# EAGLE board TMC2209_Circuit_v30 (EAGLE 9.7.0)
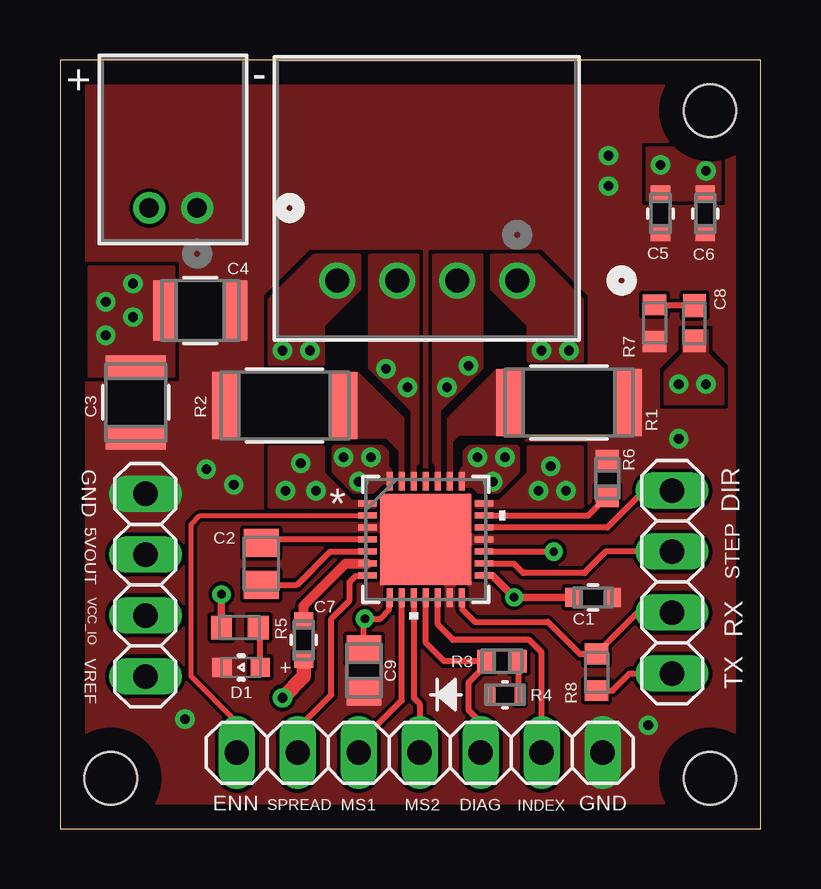
[diagram p0: board, top side]
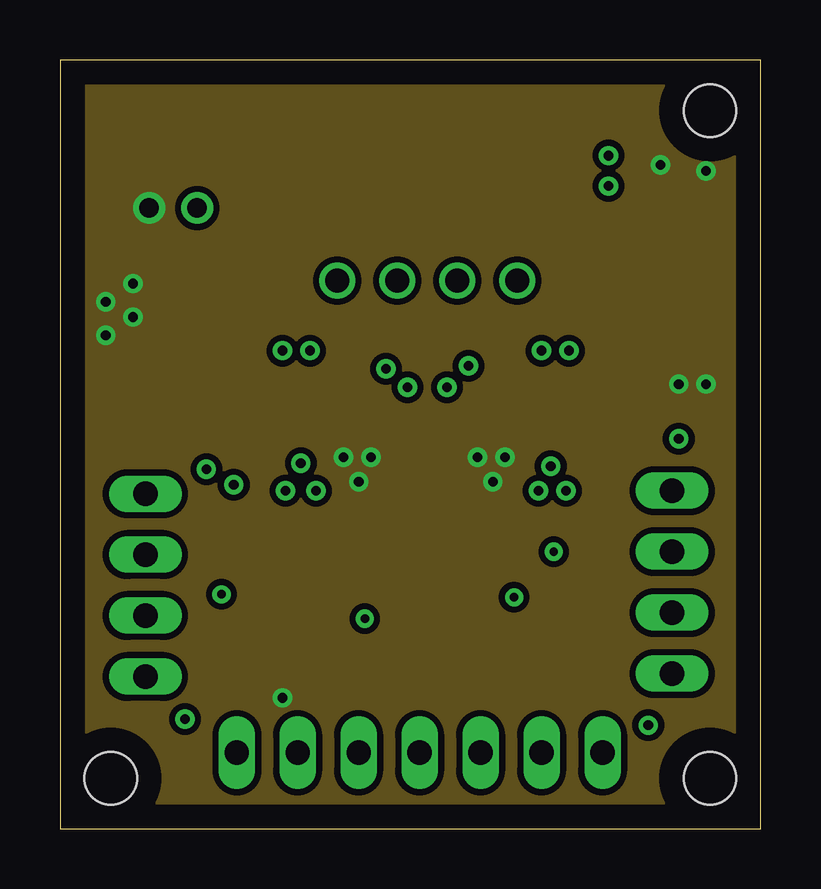
[diagram p1: board, inner layer Route2]
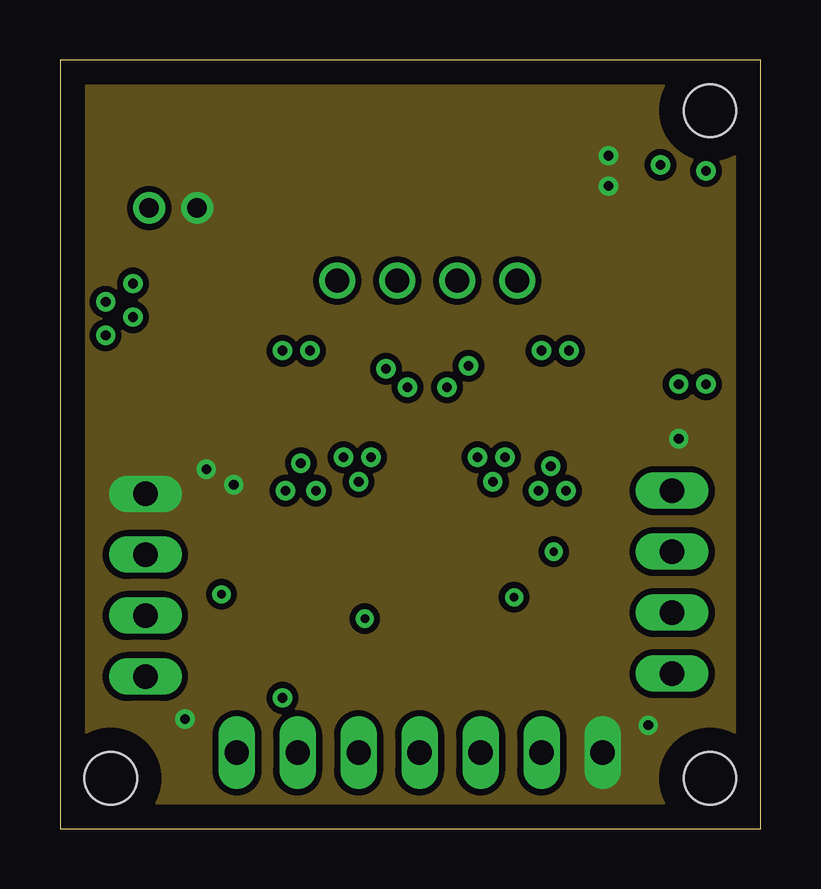
[diagram p2: board, inner layer Route15]
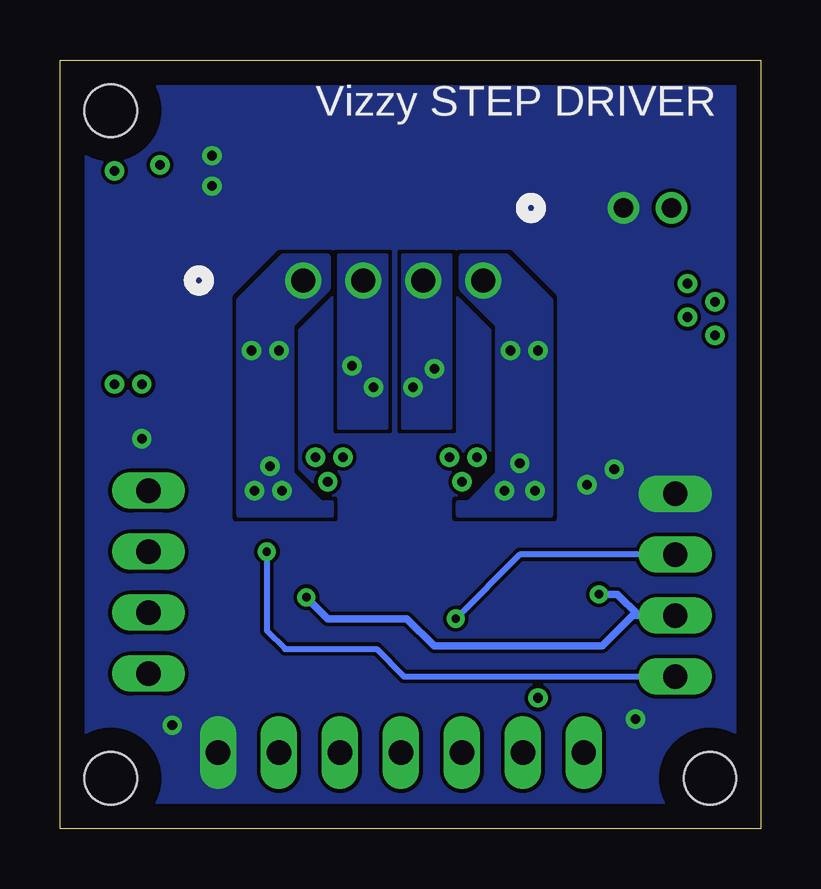
[diagram p3: board, bottom side, seen from below]

Size 29.19 x 32.05 mm. Coordinates in mm from the lower left corner, seen from the top.
Outline: 0,0 29.19,0 29.19,32.05 0,32.05 0,0
Copper layers (1+2*15+16): Top 0.035mm / dielectric 1.5mm / Route2 0.035mm / dielectric 0.15mm / Route15 0.035mm / dielectric 0.2mm / Bottom 0.035mm
Design rules "oshpark-4layer.dru": minimum track width 6mil, minimum drill 0.35mm, track to track 6mil, track to pad 6mil, pad to pad 6mil, via to via 6mil, smd to smd 6mil, copper to edge 40mil, drill to drill 6mil, minimum pad ring 10mil, minimum via ring 8mil, stop-mask expansion 4mil, vias tented up to drill 0mil, thermal gap 10mil
Holes 2.18 mm at 27.08,29.95 27.08,2.11 2.11,2.11

## Footprints (pad centres in the part's own frame; a part is rotated, then mirrored left to right if it is on the bottom)
CAP_CL10_SAM = smd 0.656 x 0.8: 1 -0.828,0; 2 0.828,0
CAPC2012X120N = smd 1.16 x 1.47: 1 -0.875,0; 2 0.875,0
CAP_CL32_SAM = smd 0.956 x 2.5: 1 -1.478,0; 2 1.478,0
CAPC1608X90N = smd 0.95 x 0.93: 1 -0.738,0; 2 0.738,0
CAP_CC0805_YAG = smd 1.118 x 1.448: 1 -0.897,0; 2 0.897,0
WL-SMCW_0603 = smd 0.8 x 0.8: 1 -0.8,0; 2 0.8,0
CONN_S4B-XH-A(LF)(SN)_JST = drill 0.991 pad 1.499: 1 0,0; 2 2.5,0; 3 5,0; 4 7.5,0
CONN_S2B-PH-K-S_JST = drill 0.813 pad 1.321: 1 0,0; 2 2,0
RES_WSLT2010_VIS = smd 1.118 x 2.794: 1 -2.464,0; 2 2.464,0
RES_CRCW_0603 = smd 0.711 x 0.94: 1 -0.673,0; 2 0.673,0
LED_SMLD12_ROM = smd 0.394 x 0.813: 1 -0.603,0; 2 0.603,0
RESC1508X50N = smd 0.86 x 0.98: 1 -0.765,0; 2 0.765,0
RES_CRCW_0603_VIS = smd 0.864 x 0.94: 1 -0.749,0; 2 0.749,0
QFN28_5X5_3X8_EPAD_TRI = smd 0.762 x 0.254: 1 -2.426,1.5; 2 -2.426,1; 3 -2.426,0.5; 4 -2.426,0; 5 -2.426,-0.5; 6 -2.426,-1; 7 -2.426,-1.5; 15 2.426,-1.5; 16 2.426,-1; 17 2.426,-0.5; 18 2.426,0; 19 2.426,0.5; 20 2.426,1; 21 2.426,1.5 | smd 0.254 x 0.762: 8 -1.5,-2.426; 9 -1,-2.426; 10 -0.5,-2.426; 11 0,-2.426; 12 0.5,-2.426; 13 1,-2.426; 14 1.5,-2.426; 22 1.5,2.426; 23 1,2.426; 24 0.5,2.426; 25 0,2.426; 26 -0.5,2.426; 27 -1,2.426; 28 -1.5,2.426 | smd 3.785 x 3.785: 29 0,0
1X04 = drill 1.016 long: 1 -3.81,0; 2 -1.27,0; 3 1.27,0; 4 3.81,0
1X07 = drill 1.016 long: 1 -7.62,0; 2 -5.08,0; 3 -2.54,0; 4 0,0; 5 2.54,0; 6 5.08,0; 7 7.62,0

## Placement (x,y rotation side)
C1  CL10B104KB8NNNCCAP_CL10_SAM  [CAP_CL10_SAM]  22.21,9.65 0 top
C2  C0805C223F5GEC7210  [CAPC2012X120N]  8.38,11.05 90 top
C3  CL32B106KBJNNNECAP_CL32_SAM  [CAP_CL32_SAM]  3.15,17.78 90 top
C4  CL32B106KBJNNNECAP_CL32_SAM  [CAP_CL32_SAM]  5.84,21.61 180 top
C5  CL10B104KB8NNNCCAP_CL10_SAM  [CAP_CL10_SAM]  25.02,25.65 90 top
C6  CL10B104KB8NNNCCAP_CL10_SAM  [CAP_CL10_SAM]  26.89,25.65 90 top
C7  CL10B104KB8NNNCCAP_CL10_SAM  [CAP_CL10_SAM]  10.16,7.87 270 top
C8  UMK107BJ105KA-T  [CAPC1608X90N]  26.44,21.08 270 top
C9  CC0805KKX7R9BB225CAP_CC0805_YAG  [CAP_CC0805_YAG]  12.66,6.6 270 top
D1  WL-SMCW_0603  [WL-SMCW_0603]  7.55,6.73 0 top
J1  S4B-XH-A(LF)(SN)CONN_S4B-XH-A(LF)(SN)_JST  [CONN_S4B-XH-A(LF)(SN)_JST]  19.05,22.86 180 top
J2  S2B-PH-K-S(LF)(SN)CONN_S2B-PH-K-S_JST  [CONN_S2B-PH-K-S_JST]  5.71,25.88 180 top
R1  WSLT2010R1200FEB18RES_WSLT2010_VIS  [RES_WSLT2010_VIS]  21.21,17.78 180 top
R2  WSLT2010R1200FEB18RES_WSLT2010_VIS  [RES_WSLT2010_VIS]  9.36,17.65 0 top
R3  CRCW0603220RFKEARES_CRCW_0603  [RES_CRCW_0603]  18.42,6.99 0 top
R4  SMLEN3WBC8W1LED_SMLD12_ROM  [LED_SMLD12_ROM]  18.54,5.59 0 top
R5  CRCW06031K00FKEA  [RESC1508X50N]  7.49,8.38 0 top
R6  CRCW0603100KFKEARES_CRCW_0603_VIS  [RES_CRCW_0603_VIS]  22.8,14.61 270 top
R7  CRCW06031R10FKEA  [RESC1508X50N]  24.77,21.08 90 top
R8  CRCW06031K00FKEA  [RESC1508X50N]  22.35,6.53 90 top
U1  TMC2209-LA-TQFN28_5X5_3X8_EPAD_TRI  [QFN28_5X5_3X8_EPAD_TRI]  15.24,12.07 0 top
U$1  PINHD-1X04_1X04M  [1X04]  3.56,10.16 90 top
U$2  PINHD-1X07_1X07M  [1X07]  14.99,3.17 180 top
U$3  PINHD-1X04_1X04M  [1X04]  25.51,10.29 270 top

## Library data of the parts
C1 C5-C7 = 100nF_Cap; COPYRIGHT: Copyright (C) 2025 Ultra Librarian. All rights reserved.; MANUFACTURER_PART_NUMBER: CL10B104KB8NNNC; MFR_NAME: Samsung
C2 = C0805C223F5GEC7210
C3 C4 = 10uF; COPYRIGHT: Copyright (C) 2025 Ultra Librarian. All rights reserved.; MANUFACTURER_PART_NUMBER: CL32B106KBJNNNE; MFR_NAME: Samsung
C8 = UMK107BJ105KA-T
C9 = 2.2uF; COPYRIGHT: Copyright (C) 2025 Ultra Librarian. All rights reserved.; MANUFACTURER_PART_NUMBER: CC0805KKX7R9BB225; MFR_NAME: Yageo
D1 = WL-SMCW_0603BLED
J1 = 2025-03-22_04-32-02_Library; COPYRIGHT: Copyright (C) 2025 Ultra Librarian. All rights reserved.; MANUFACTURER_PART_NUMBER: S4B-XH-A(LF)(SN); MFR_NAME: JST
J2 = 2025-03-22_04-08-40_Library; COPYRIGHT: Copyright (C) 2025 Ultra Librarian. All rights reserved.; MANUFACTURER_PART_NUMBER: S2B-PH-K-S(LF)(SN); MFR_NAME: JST
R1 R2 = res.12ohm; COPYRIGHT: Copyright (C) 2025 Ultra Librarian. All rights reserved.; MANUFACTURER_PART_NUMBER: WSLT2010R1200FEB18; MFR_NAME: Vishay
R3 = 220R; COPYRIGHT: Copyright (C) 2025 Ultra Librarian. All rights reserved.; MANUFACTURER_PART_NUMBER: CRCW0603220RFKEA; MFR_NAME: Vishay
R4 = 2025-03-23_04-23-12_Library; COPYRIGHT: Copyright (C) 2025 Ultra Librarian. All rights reserved.; MANUFACTURER_PART_NUMBER: SMLEN3WBC8W1; MFR_NAME: ROHM Semiconductor
R5 R8 = CRCW06031K00FKEA
R6 = 2025-03-22_00-16-48_Library; COPYRIGHT: Copyright (C) 2025 Ultra Librarian. All rights reserved.; MANUFACTURER_PART_NUMBER: CRCW0603100KFKEA; MFR_NAME: Vishay
R7 = CRCW06031R10FKEA
U1 = TMC2209_NewFootprint; COPYRIGHT: Copyright (C) 2025 Ultra Librarian. All rights reserved.; MANUFACTURER_PART_NUMBER: TMC2209-LA-T; MFR_NAME: Analog Devices / Trinamic
U$1-U$3 = Tinkercad

## Nets
5VOUT: C9.1 U1.8 U$1.3
A1: J1.2 U1.24
A2: J1.1 U1.21
B1: J1.3 U1.26
B2: J1.4 U1.1
BRA: R1.2 U1.23
BRB: R2.2 U1.27
CPI: C2.1 U1.5
CPO: C2.2 U1.4
DIAG: R3.1 U1.11 U$2.3
DIR: U1.19 U$3.1
ENN: U1.2 U$2.7
GND: C1.2 C3.1 C4.1 C5.1 C6.1 C9.2 D1.1 J2.1 R1.1 R2.1 R4.1 R6.1 R7.1 U1.3 U1.13 U1.18 U1.29 U$1.4 U$2.1
INDEX: U1.12 U$2.2
MS1: U1.9 U$2.5
MS2: U1.10 U$2.4
N$4: R3.2 R4.2
N$6: D1.2 R5.2
N$10: C8.1 R7.2
RX: R8.2 U1.14 U$3.3
SPREAD: U1.7 U$2.6
STDBY: R6.2 U1.20
STEP: U1.16 U$3.2
TX: R8.1 U$3.4
VCC: C3.2 C4.2 C5.2 C6.2 C7.2 C8.2 J2.2 U1.22 U1.28
VCC_IO: C1.1 R5.1 U1.15 U$1.2
VCP: C7.1 U1.6
VREF: U1.17 U$1.1

## Tracks (layer width: path | path; a pad name or v marks a point on that pad's centre or on a via)
5VOUT  (via drill 0.35)
  Top 0.254: U1.8 13.72,9.61 13.72,9.14 13.33,8.76 v12.7,8.76 12.66,8.73 C9.1
  Bottom 0.254: v12.7,8.76 10.03,11.43 U$1.3
A1  (via drill 0.4)
  other vias: 16.13,18.41 17.02,19.3
  pour Top (no thermals): 15.69,15.16 15.7,15.13 15.7,14.43 15.8,14.43 15.8,17.41 15.81,17.44 17.58,19.21 17.58,23.93 15.57,23.93 15.57,15.27
  pour Bottom (isolate 0.254, no thermals): 15.57,16.71 17.58,16.71 17.58,23.93 15.57,23.93
A2  (via drill 0.4)
  other vias: 20.07,19.94 21.21,19.94 19.94,14.1 21.08,14.1 20.45,15.11
  pour Bottom (no thermals): 19.54,14.79 18.36,13.61 18.31,13.59 17.91,13.59 17.91,13.08 21.72,13.08 21.72,22.05 19.89,23.88 18.03,23.88 18.03,22.53 19.54,21.03 19.56,20.98 19.56,14.83
  pour Top (no thermals): 19.5,14.82 18.33,13.65 18.3,13.64 17.35,13.64 17.35,13.41 21.77,13.41 21.77,15.93 19.51,15.93 19.51,14.84
  pour Top (no thermals): 19.5,21 19.51,20.97 19.51,19.51 21.77,19.51 21.77,22.07 19.91,23.93 17.98,23.93 17.98,22.51
B1  (via drill 0.4)
  other vias: 13.59,19.18 14.48,18.41
  pour Bottom (isolate 0.254, no thermals): 12.9,16.71 14.91,16.71 14.91,23.93 12.9,23.93
  pour Top (no thermals): 14.67,17.44 14.68,17.41 14.68,14.43 14.78,14.43 14.78,15.13 14.79,15.16 14.91,15.27 14.91,23.93 12.9,23.93 12.9,19.21
B2  (via drill 0.4)
  other vias: 9.27,19.94 10.41,19.94 10.67,14.1 10.03,15.24 9.4,14.1
  pour Bottom (no thermals): 10.94,14.79 10.92,14.83 10.92,20.98 10.94,21.03 12.45,22.53 12.45,23.88 10.59,23.88 8.76,22.05 8.76,13.08 12.57,13.08 12.57,13.59 12.17,13.59 12.12,13.61
  pour Top (no thermals): 12.18,13.64 12.15,13.65 10.98,14.82 10.97,14.84 10.97,15.93 8.71,15.93 8.71,13.41 13.13,13.41 13.13,13.64
  pour Top (no thermals): 8.71,19.38 10.97,19.38 10.97,20.97 10.98,21 12.5,22.51 12.5,23.93 10.57,23.93 8.71,22.07
BRA
  pour Top (no thermals): 16.21,14.43 16.31,14.43 16.31,16.14 16.32,16.17 16.59,16.45 16.62,16.46 19.23,16.46 19.23,19.1 18.19,19.1 16.21,17.11
BRB
  pour Top (no thermals): 14.16,15.79 14.17,15.76 14.17,14.43 14.27,14.43 14.27,17.11 12.41,18.97 11.38,18.97 11.38,16.33 13.6,16.33 13.63,16.32
CPI
  Top 0.254: C2.1 9.88,10.17 11.27,11.57 U1.5
CPO
  Top 0.254: U1.4 8.52,12.07 C2.2
DIAG
  Top 0.254: U1.11 15.24,7.75 16,6.99 R3.1 17.74,6.82 17.02,6.1 17.02,4.95 17.53,4.45 U$2.3
DIR
  Top 0.254: U$3.1 24.34,14.1 22.81,12.57 U1.19
ENN
  Top 0.203: U1.2 5.83,13.06 5.46,12.7 5.46,6.35 7.37,4.45 U$2.7
GND  (via drill 0.4)
  other vias: 22.86,28.07 22.86,26.8 7.24,14.35 6.1,14.99 5.21,4.57 24.51,4.32 25.78,16.26
  pour Route15 (isolate 0.254, no thermals): -6.27,-4.37 35.48,-4.37 35.48,36.12 -6.27,36.12
  pour Top (rank 2, no thermals): 0.08,0.08 29.13,0.08 29.13,32.31 0.08,32.31
  pour Bottom (rank 2, no thermals): 0.08,0.71 29.13,0.71 29.13,32.31 0.08,32.31
INDEX
  Top 0.254: U$2.2 20.07,7.37 19.56,7.87 16.38,7.87 15.74,8.52 U1.12
MS1
  Top 0.254: U$2.5 12.45,3.56 14.24,5.35 U1.9
MS2
  Top 0.254: U1.10 14.74,5.45 14.99,5.21 U$2.4
N$4
  Top 0.254: R4.2 19.09,5.65 R3.2
N$6
  Top 0.254: D1.2 8.35,8.29 R5.2
N$10
  Top 0.254: C8.1 24.79,21.82 R7.2
RX
  Top 0.254: U1.14 16.76,9.61 16.76,9.14 17.27,8.64 20.32,8.64 21.66,7.29 R8.2 24.07,9.02 U$3.3
SPREAD
  Top 0.254: U1.7 12.79,10.54 12.32,10.54 12.06,10.29 12.06,9.52 11.3,8.76 11.3,5.59 9.91,4.19 U$2.6
STDBY
  Top 0.254: U1.20 22.01,13.06 R6.2
STEP
  Top 0.254: U1.16 17.68,11.05 18.92,11.05 19.3,10.67 21.84,10.67 22.73,11.56 U$3.2
TX
  Top 0.254: R8.1 23.04,5.76 23.75,6.48 U$3.4
VCC  (via drill 0.4)
  Top 0.61: C7.2 10.16,6.35 v9.27,5.46
  other vias: 25.78,18.54 26.92,18.54 25.02,27.69 3.05,22.73 1.9,21.97 3.05,21.34 1.9,20.57 11.81,15.49 12.95,15.49 12.45,14.48 17.4,15.49 18.54,15.49 18.03,14.48 26.92,27.44
  pour Route2 (isolate 0.254, no thermals): -6.27,-4.37 35.48,-4.37 35.48,36.12 -6.27,36.12
  pour Top (no thermals): 13.72,14.48 13.72,14.93 13.61,15.04 13.59,15.09 13.59,15.7 13.41,15.88 11.43,15.88 11.43,14.91 12.24,14.1 13.03,14.1 13.39,14.46 13.44,14.48
  pour Top (no thermals): 16.76,14.93 16.76,14.35 17.17,14.35 17.22,14.33 17.45,14.1 18.24,14.1 19.05,14.91 19.05,15.88 17.07,15.88 16.89,15.7 16.89,15.09 16.87,15.04
  pour Top (no thermals): 25.98,19.8 25.97,19.77 25.22,19.02 25.22,17.73 27.61,17.73 27.61,19.15 26.99,19.77 26.97,19.8 26.97,20.75 25.98,20.75
  pour Top (no thermals): 24.46,26.24 27.48,26.24 27.48,28.37 24.46,28.37
  pour Top (no thermals): 1.22,18.87 4.75,18.87 4.75,23.42 1.22,23.42
VCC_IO  (via drill 0.35)
  Top 0.305: C1.1 v18.92,9.65 18.01,10.57 U1.15 | v6.73,9.78 R5.1
  Bottom 0.305: U$1.2 5.08,8.89 | 5.08,8.89 5.33,8.89 6.6,7.62 13.59,7.62 14.73,8.76 18.03,8.76 v18.92,9.65 | 5.08,8.89 5.97,9.78 v6.73,9.78
VCP
  Top 0.406: C7.1 10.16,9.32 11.53,10.69 11.89,11.05 11.91,11.07 U1.6
VREF  (via drill 0.35)
  Top 0.254: U1.17 v20.57,11.57 v20.57,11.56
  Bottom 0.254: U$1.1 14.86,6.35 16,7.49 19.81,7.49 20.57,8.25 v20.57,11.56

## Text on the board
tPlace: + | - | C4 | C3 | GND | 5VOUT | DIR | STEP | VCC_IO | RX | VREF | TX | GND | ENN | SPREAD | MS1 | MS2 | INDEX | DIAG
bPlace: Vizzy STEP DRIVER